# Altium PCB Current-to-Voltage.PcbDoc
Units mm, origin at the board's own origin, x right, y up, seen from the top; angles counter-clockwise.
Board outline 51.94 x 38.23 mm, 2 copper layers (Top Layer, Bottom Layer); 30 components, 23 nets, 98 pads, 14 vias.
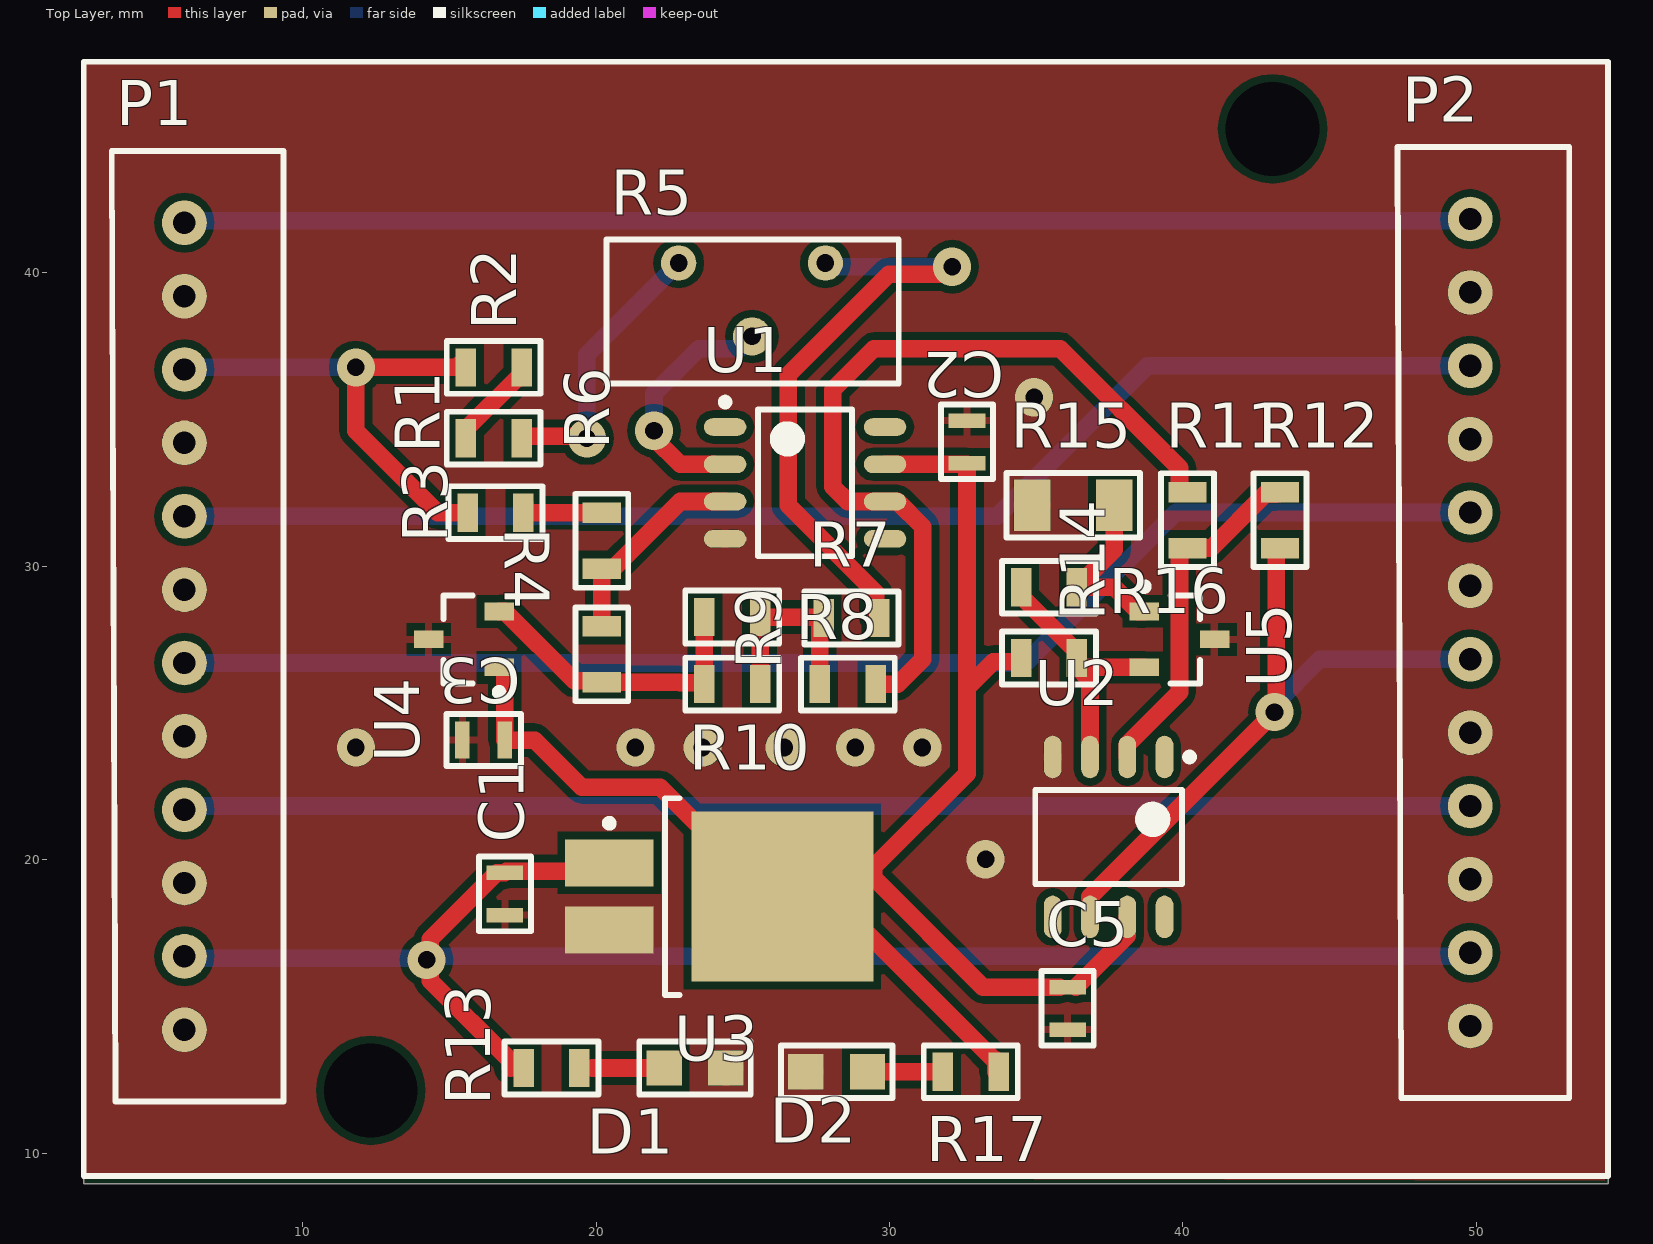
[diagram p0: Top Layer view]
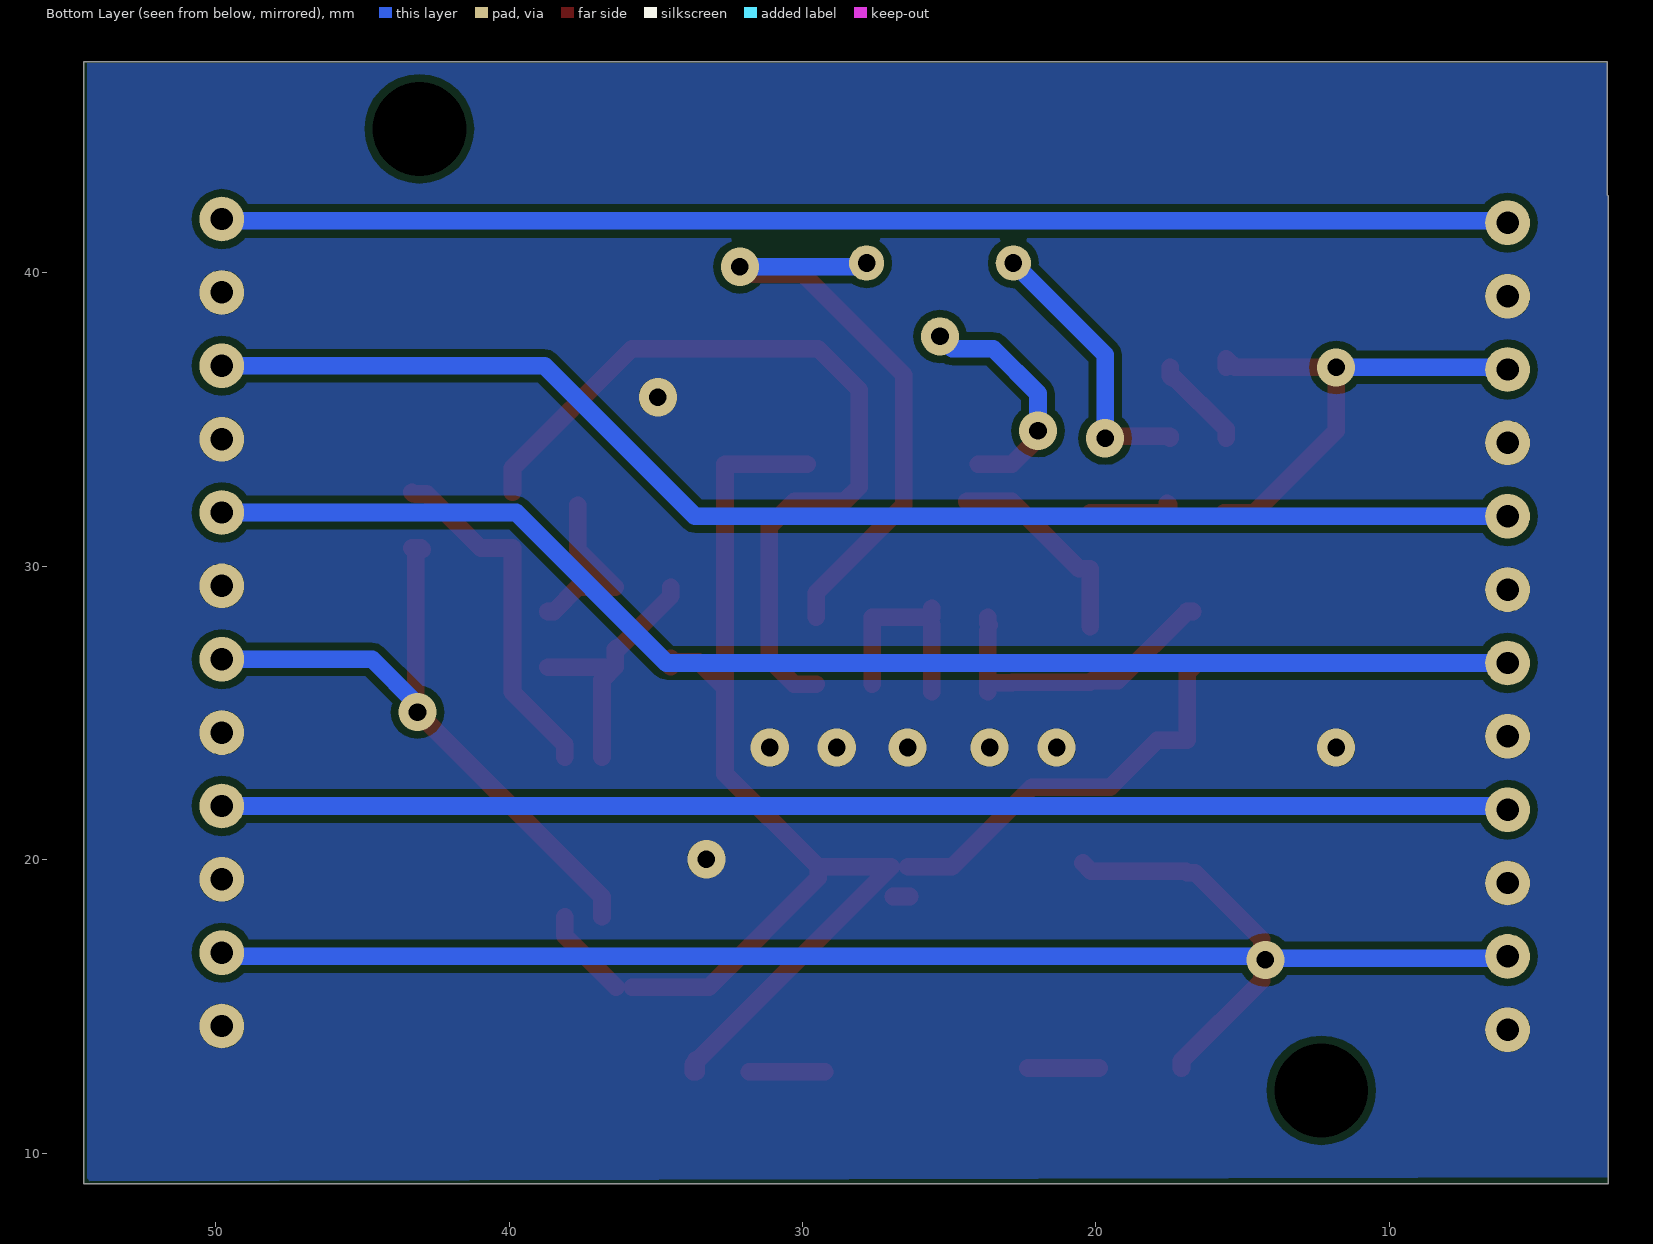
[diagram p1: Bottom Layer view, seen from below]
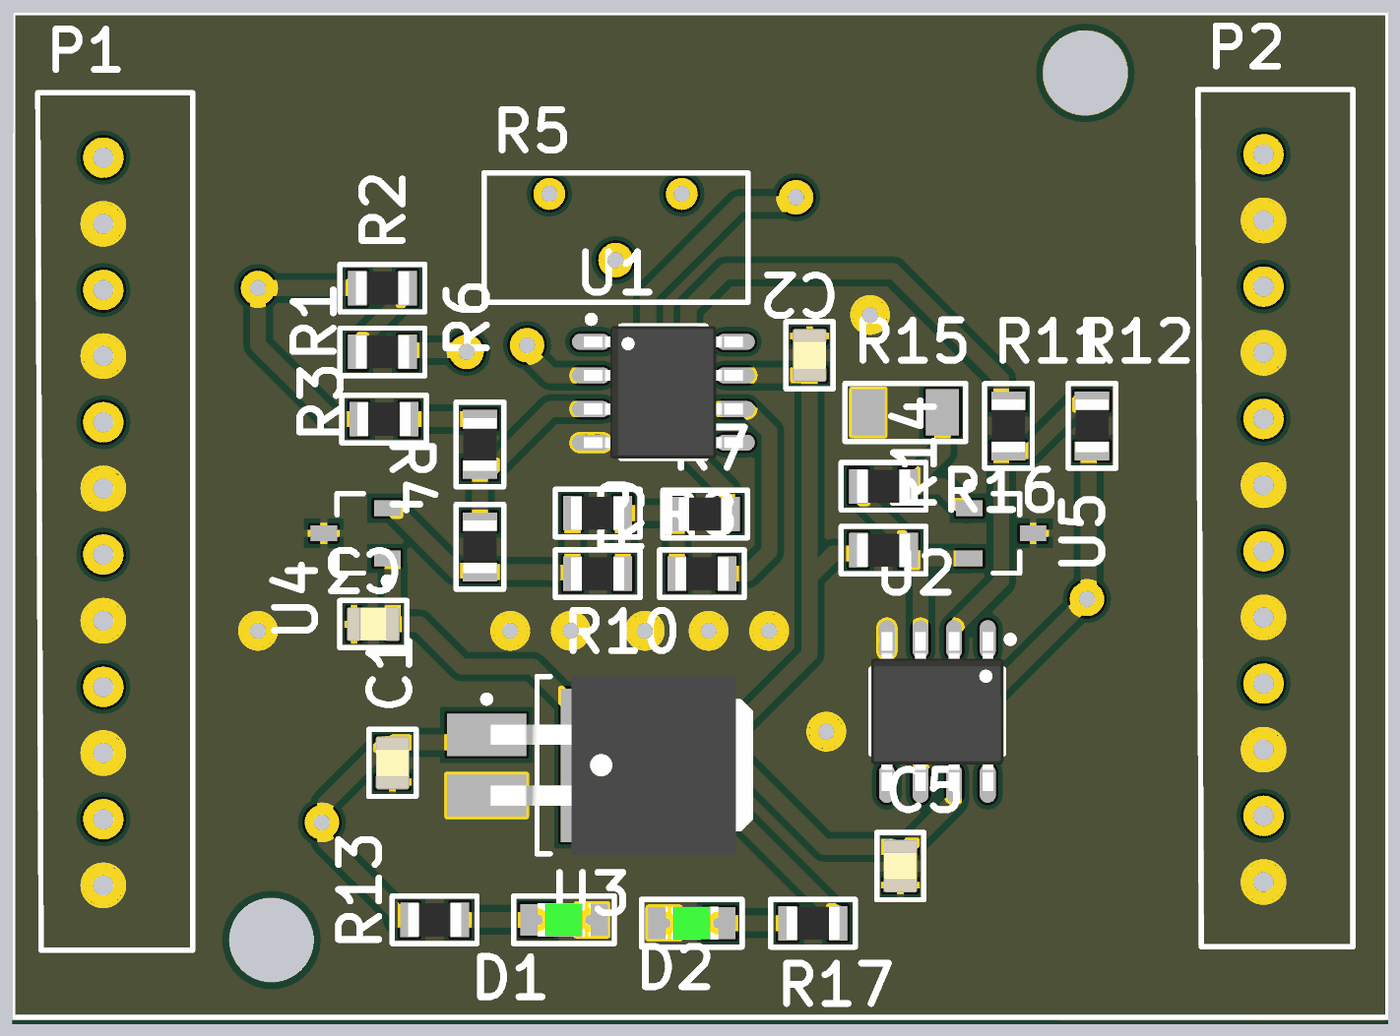
[diagram p2: 3D render of the assembled board from above, using the file's embedded part models]

## Layer stack, top to bottom
Top Solder: solder mask 0.0102, Solder Resist, Dk 3.5
Top Layer: signal copper 0.0356
Dielectric 1: dielectric 0.32, FR-4, Dk 4.8
Bottom Layer: signal copper 0.0356
Bottom Solder: solder mask 0.0102, Solder Resist, Dk 3.5

## Board outline
2.541,41.364 2.541,42.617 2.568,42.643 2.568,47.189 54.484,47.189 54.484,8.962 2.541,8.962

## Design rules (kind name [scope] priority, off if disabled: settings)
Clearance [All] p1: gap=0.254 ignorepadtopadclearanceinfootprint=FALSE except(0: Arc-Hole Track-Hole SMDPad-Hole THPad-Hole Via-Hole Fill-Hole Poly-Hole Region-Hole Text-Hole)
HoleSize [All] p1: absolutevalues=TRUE maxlimit=3.54 minlimit=0.025 maxpercent=80.000 minpercent=20.000
PolygonConnect [All vs HasFootprint('C0805')] p1: connectstyle=Relief reliefconductorwidth=0.254 reliefentries=4 polygonreliefangle="90 Angle" airgapwidth=0.254
RoutingVias [All] p1: holewidth=0.711 width=1.27 viastyle="Through Hole" minholewidth=0.711 minwidth=1.27 maxholewidth=0.711 maxwidth=1.27
SolderMaskExpansion [All] p1: expansion=0.102
Width 0.6mm [All] p1: maxlimit=0.6 minlimit=0.6 preferedwidth=0.6 minimp=50.000000 maximp=50.000000 favimp=50.000000
Width 0.4mm [All] p2: maxlimit=0.4 minlimit=0.4 preferedwidth=0.4 minimp=50.000000 maximp=50.000000 favimp=50.000000
Width [All] p3: maxlimit=0.254 minlimit=0.254 preferedwidth=0.254
29 further rules are at their usual default settings.

## Components (designator, comment, footprint, x,y, rotation, side; value= is the part's Value field where it differs from the comment)
C1 "Capacitor" C0805 16.892,18.831 r90 top value=470nF
C2 "Capacitor" C0805 32.64,34.235 r270 top value=1uF
C3 "Capacitor" C0805 16.167,24.075 r0 top
C5 "Capacitor" C0805 36.069,14.931 r90 top value=1uF
D1 "LED" LED0805 23.369,12.899 r180 top
D2 "LED" LED0805 28.195,12.772 r0 top
P1 "JST12XH" JST12XH 5.97,27.952 r0 top
P2 "JST12XH" JST12XH 49.785,28.079 r0 top
R1 "Resistor" "R0805 - duplicate2" 16.511,34.362 r0 top
R2 "Resistor" "R0805 - duplicate2" 16.511,36.775 r0 top
R3 "Resistor" "R0805 - duplicate2" 16.572,31.822 r180 top
R4 "Resistor" "R0805 - duplicate2" 20.194,30.867 r270 top
R5 "Potentiometer" POT3 25.314,39.131 r90 top
R6 "Resistor" "R0805 - duplicate2" 20.194,26.996 r270 top
R7 "Resistor" "R0805 - duplicate2" 28.703,28.234 r180 top
R8 "Resistor" "R0805 - duplicate2" 24.639,28.266 r0 top
R9 "Resistor" "R0805 - duplicate2" 28.576,25.98 r0 top
R10 "Resistor" "R0805 - duplicate2" 24.639,25.98 r180 top
R11 "Resistor" "R0805 - duplicate2" 40.151,31.568 r90 top
R12 "Resistor" "R0805 - duplicate2" 43.308,31.568 r90 top
R13 "Resistor" "R0805 - duplicate2" 18.482,12.899 r180 top
R14 "Resistor" "R0805 - duplicate2" 35.434,26.869 r180 top
R15 "Resistor" "R1206 - duplicate" 36.259,32.076 r0 top
R16 "Resistor" "R0805 - duplicate2" 35.434,29.282 r0 top
R17 "Resistor" "R0805 - duplicate2" 32.767,12.772 r0 top
U1 "AD820" SOIC127P600X175-8N 27.121,32.838 r0 top
U2 "AD820" SOIC127P600X175-8N 37.466,20.773 r270 top
U3 "MC7815" DPAK229P991X238-3N 24.548,18.743 r0 top
U4 "NCP5146" SOT95P237X110-3N 15.495,27.504 r180 top
U5 "LM4041-ADJ" SOT95P237X110-3N 39.879,27.504 r0 top

## Footprints (in the part's own frame and the unit in brackets; to place one, negate y for a bottom-side part, rotate by r counter-clockwise, add the part's x,y. Pads: shape width x height; smd on the part's side, far side on the other; paste and mask are expansions set on the pad)
C0805 [mm]
  rect 0.5x1.25 smd: 1(-0.725,0) 2(0.725,0)
  silkscreen extent -1.27,-0.89 1.27,0.89, body extent -1,-0.63 1,0.63, height 0.57
DPAK229P991X238-3N [mm] "D-PAK, 3-Pads, Body 6.21x6.73mm (max), IPC Medium Density"
  rect 3x1.6 smd: 1(-4.1,1.145) 2(-4.1,-1.145)
  rect 6.2x5.8 smd: 3(1.8,0)
  silkscreen extent -4.22,-3.35 -1.7,3.35, body extent -3.95,-3.37 5.95,3.37, height 2.51
JST12XH [mil]
  round 60 hole 30: 1(0,541.34) 2(0,442.91) 3(0,344.49) 4(0,246.06) 5(0,147.64) 6(0,49.21) 7(0,-49.21) 8(0,-147.64) 9(0,-246.06) 10(0,-344.49) 11(0,-442.91) 12(0,-541.34)
  silkscreen extent -97,-638 133,638
LED0805 [mm]
  rect 1.2x1.2 smd: 1(-1.05,0) 2(1.05,0)
  silkscreen extent -1.9,-0.9 1.9,0.9, body extent -1,-0.62 1,0.62, height 1.12
POT3 [mm]
  round 1.2 hole 0.6: 1(1.2,2.5) 3(1.2,-2.5)
  round 1.3 hole 0.6: 2(-1.3,0)
  silkscreen extent -2.9,-5 2,4.96
"R0805 - duplicate2" [mm]
  rect 0.7x1.3 smd: 1(-0.95,0) 2(0.95,0)
  silkscreen extent -1.6,-0.9 1.6,0.9, body extent -1,-0.62 1,0.63, height 0.61
"R1206 - duplicate" [mm]
  rect 1.25x1.75 smd: 1(-1.4,0) 2(1.4,0)
  silkscreen extent -2.27,-1.1 2.27,1.1
SOIC127P600X175-8N [mm] "SOIC, 8-Leads, Body 4.90x3.90mm, Pitch 1.27mm, IPC Medium Density"
  oval 1.45x0.6 smd: 1(-2.725,1.905) 2(-2.725,0.635) 3(-2.725,-0.635) 4(-2.725,-1.905) 5(2.725,-1.905) 6(2.725,-0.635) 7(2.725,0.635) 8(2.725,1.905)
  silkscreen extent -2.85,-2.5 1.6,2.88, body extent -3,-2.5 3,2.5, height 1.75
SOT95P237X110-3N [mm] "SOT23, 3-Leads, Body 2.92x2.37mm, Pitch 0.95mm, IPC Medium Density"
  rect 1x0.6 smd: 1(-1.2,0.95) 2(-1.2,-0.95) 3(1.2,0)
  silkscreen extent -1.33,-1.5 0.7,1.92, body extent -0.7,-1.52 0.7,1.52, height 1.1

## Free pads (board coordinates)
  round 1.524 hole 3.2 unplated: 1(12.32,12.137)
  round 1.524 hole 3.2: 2(43.054,44.903)

## Via types
v1: diameter 1.3, hole 0.6, Top Layer to Bottom Layer, 14 vias

## Nets (pads, with @x,y where several pads share a name; then routed paths per layer and width w, separated by ;. In a path a pad name is that pad's centre, name@x,y a point inside that pad or via, vN(x,y) a via of type N, cw(c..) or ccw(c..) an arc to the next point about the centre after c; other vN are vias at no path point)
1.62V: R14.1 R16.1 U2.3 U5.2 | length 9.1
  Top Layer w0.6: R16.1 34.484,28.982 36.247,27.219 36.334,27.219 36.384,27.169 R14.1 R14.1@36.384,26.604 ; U2.3 36.831,26.122 36.384,26.569 R14.1@36.384,26.604 ; U5.2 36.434,26.554 R14.1@36.384,26.604
3V3: R6.2 R8.1 R10.2 U4.2 | length 10.7
  Top Layer w0.6: U4.2 16.895,28.454 19.253,26.096 20.144,26.096 R6.2 22.841,26.046 22.861,26.026 23.689,26.026 R10.2 23.689,25.726 R8.1@23.689,27.797 ; R8.1@23.639,28.001 23.689,28.051 R8.1
15V: C2.2 C3.2 C5.2 R14.2 R17.2 U1.7 U2.7 U3.3 U4.1 | length 58.9
  Top Layer w0.6: U4.1 16.892,26.357 C3.2 17.908,24.075 19.514,22.469 22.181,22.469 24.893,19.757 U3.3@26.417,19.757 ; U3.3 U3.3@26.912,18.743 ; U1.7 32.64,33.473 32.64,25.853 ; R17.2@33.627,12.772 R17.2@33.627,13.111 ; R17.2@33.627,13.182 R17.2@33.627,13.111 ; R17.2 33.717,13.021 R17.2@33.627,13.111 ; R14.2 34.484,26.569 34.311,26.742 33.529,26.742 32.64,25.853 ; C5.2@35.794,15.656 33.185,15.656 29.465,19.376 29.465,19.757 ; C5.2@36.344,15.656 38.101,17.413 U2.7 ; 29.465,19.757 32.64,22.932 32.64,25.853 ; 29.465,19.757 26.981,19.757 R17.2@33.627,13.111
GND: C1.1 C2.1 C3.1 C5.1 D1.1 D2.1 P1.2 P1.4 P1.6 P1.8 P1.10 P1.12 P2.2 P2.4 P2.6 P2.8 P2.10 P2.12 R15.1 U1.4 U2.4 U3.2 U4.3 U5.3
  other v1: 33.275,20.011 11.812,23.821 21.337,23.821 23.623,23.821 26.417,23.821 28.83,23.821 31.116,23.821 34.926,35.759
L+: C1.2 P1.11 P2.11 R13.2 U3.1 | length 56.8
  Top Layer w0.6: 17.082,12.899 17.082,13.149 14.354,15.878 14.354,16.454 v1(14.225,16.582) 14.354,16.71 14.354,17.292 16.617,19.556 C1.2 16.942,19.606 20.166,19.606 U3.1
  Bottom Layer w0.6: P1.11 6.03,16.642 14.165,16.642 v1(14.225,16.582) 14.349,16.705 49.662,16.705 P2.11
M: P1.1 P2.1 | length 43.9
  Bottom Layer w0.6: P1.1 6.034,41.765 49.722,41.765 P2.1
MF: P1.7 P2.5 | length 45.9
  Bottom Layer w0.6: P1.7 34.632,26.702 39.759,31.829 P2.5
NetD1_2: D1.2 R13.1 | length 2.4
  Top Layer w0.6: 19.882,12.899 D1.2
NetD2_2: D2.2 R17.1 | length 2.6
  Top Layer w0.6: D2.2 R17.1
NetR1_1: R1.1 R2.2 | length 3.3
  Top Layer w0.6: R1.1 15.561,34.662 17.324,36.425 17.411,36.425 17.461,36.475 R2.2
NetR1_2: R1.2 R5.1 | length 9
  Top Layer w0.6: R1.2 17.461,34.375 R1.2@17.511,34.425 ; R1.2@17.461,34.425 R1.2@17.511,34.425 ; v1(19.686,34.362) 19.623,34.425 R1.2@17.511,34.425
  Bottom Layer w0.6: v1(19.686,34.362) 19.686,37.203 R5.1@22.393,39.91
NetR3_1: R3.1 R4.1 | length 3.1
  Top Layer w0.6: R3.1@17.572,32.148 17.522,32.098 R3.1 17.525,31.819 20.192,31.819 R4.1 R4.1@20.144,31.767
NetR4_2: R4.2 R6.1 U1.3 | length 7.1
  Top Layer w0.6: R6.1 R4.2 20.575,29.917 22.861,32.203 U1.3
NetR5_2: R5.2 U1.2 | length 7.5
  Top Layer w0.6: v1(21.972,34.616) 21.972,34.362 22.861,33.473 U1.2@24.004,33.473
  Bottom Layer w0.6: v1(21.972,34.616) 21.972,35.886 23.496,37.41 R5.2@24.893,37.41
NetR5_3: R5.3 R7.1 | length 21
  Top Layer w0.6: R7.1@29.526,28.266 29.526,29.094 26.544,32.076 26.544,36.521 29.973,39.95 31.878,39.95 v1(32.132,40.204)
  Bottom Layer w0.6: R5.3 27.941,40.204 v1(32.132,40.204)
NetR7_2: R7.2 R8.2 R9.1 R10.1 | length 6.9
  Top Layer w0.6: R10.1@25.589,25.726 R8.2@25.589,28.012 ; R8.2@25.589,28.566 R8.2 27.626,28.266 R9.1
NetR11_1: R11.1 R12.2 U2.2 | length 12.3
  Top Layer w0.6: U2.2 38.101,23.923 39.879,25.701 39.879,30.618 R11.1 40.961,30.618 42.811,32.468 43.258,32.468 R12.2 ; R12.2@42.907,32.457 R12.2@43.181,32.457
NetR15_2: R15.2 R16.2 U5.1 | length 6
  Top Layer w0.6: R15.2 37.659,30.556 R16.2 37.651,29.282 38.479,28.454 U5.1
Q1: P1.5 P2.3 | length 45.9
  Bottom Layer w0.6: P1.5 33.663,31.702 38.79,36.829 P2.3
Q2: P1.9 P2.9 | length 43.9
  Bottom Layer w0.6: P1.9 6.097,21.829 P2.9
QA: P1.3 R2.1 R3.2 | length 17.2
  Top Layer w0.6: R2.1 15.561,37.075 15.261,36.775 v1(11.812,36.775) 11.812,34.616 14.606,31.822 R3.2
  Bottom Layer w0.6: P1.3 6.532,36.702 6.605,36.775 v1(11.812,36.775)
VIN: R9.2 R11.2 U1.6 | length 28.3
  Top Layer w0.6: R9.2 30.28,25.98 31.125,26.825 31.125,31.349 30.271,32.203 U1.6 28.576,32.203 28.068,32.711 28.068,36.013 29.465,37.41 35.815,37.41 39.879,33.346 R11.2@39.879,32.518
VOUT: P2.7 R12.1 U2.6 | length 23.4
  Top Layer w0.6: U2.6 36.831,18.741 v1(43.118,25.027) 43.181,25.091 43.181,30.568 42.958,30.568 43.008,30.618 R12.1
  Bottom Layer w0.6: v1@42.991,25.027 v1(43.118,25.027) 43.118,25.281 44.665,26.829 P2.7
pads on no net: U1.1 U1.5 U1.8 U2.1 U2.5 U2.8

## Polygon pours and split planes (outlines as drawn)
GND on Bottom Layer "GND" (solid, pour order 13): 2.554,9.173 54.37,9.046 54.37,47.146 2.554,47.146
GND on Top Layer "GND" (solid, pour order 12): 2.548,9.192 54.364,9.065 54.491,47.165 2.548,47.165

## Silkscreen, mask and mechanical layers (free items; w line width, h text height)
Top Overlay:
  lines w0.2: 2.541,9.216 2.541,47.189 54.484,47.189 54.484,41.474 54.484,38.299 54.484,36.997 54.484,32.838 54.484,9.216 12.447,9.216 2.541,9.216
Mechanical 15:
  lines w0.2: 2.541,8.962 2.541,41.364 2.541,42.617 2.568,42.643 2.568,44.73 2.568,47.189 5.07,47.189 54.484,47.189 54.484,34.87 54.484,28.393 54.484,15.439 54.484,8.962 12.32,8.962 2.541,8.962